# EAGLE board b0_comp (EAGLE 6.4)

Size 20 x 40 mm. Coordinates in mm from the lower left corner, seen from the top.
Copper layers (1*16): Top 0.035mm / dielectric 1.5mm / Bottom 0.035mm
Design rules "default": minimum track width 10mil, minimum drill 24mil, track to track 8mil, track to pad 8mil, pad to pad 8mil, via to via 8mil, smd to smd 8mil, copper to edge 40mil, drill to drill 8mil, minimum pad ring 10mil, minimum via ring 8mil, stop-mask expansion 4mil, vias tented up to drill 0mil, thermal gap 10mil

## Footprints (pad centres in the part's own frame; a part is rotated, then mirrored left to right if it is on the bottom)
12864B = drill 1 long: 1 15.76,-32.5; 2 13.22,-32.5; 3 10.68,-32.5; 4 8.14,-32.5; 5 5.6,-32.5; 6 3.06,-32.5; 7 0.52,-32.5; 8 -2.02,-32.5; 9 -4.56,-32.5; 10 -7.1,-32.5; 11 -9.64,-32.5; 12 -12.18,-32.5; 13 -14.72,-32.5; 14 -17.26,-32.5; 15 -19.8,-32.5; 16 -22.34,-32.5; 17 -24.88,-32.5; 18 -27.42,-32.5; 19 -29.96,-32.5; 20 -32.5,-32.5 | drill 3.2 pad 4: P$1 -44,32.5; P$2 44,32.5; P$3 44,-32.5; P$4 -44,-32.5
CASE_C61 = drill 1: !EN -24.13,7.62; +AJ 24.13,7.62; +IN -24.13,17.78; -AJ 24.13,-7.62; -IN -24.13,-17.78; AJ 24.13,0 | drill 2.5: +OUT 24.13,17.78; -OUT 24.13,-17.78 | drill 3.3: P$1 -24,25.5; P$2 24,25.5; P$3 24,-25.5; P$4 -24,-25.5
РША = drill 3.2: P$1 -8,25; P$2 8,-25

## Placement (x,y rotation side)
U$1  12864B  [12864B]  -22.48,20 0 top
U$2  HPH-12/30-D48  [CASE_C61]  -34.68,20 0 top  (outside the outline)
U$3  РША14  [РША]  10,20 0 top

## Library data of the parts
U$1-U$3 = b0